# Altium PCB NE555-PWM.PCBDOC
Units mm, origin at the board's own origin, x right, y up, seen from the top; angles counter-clockwise.
Board outline 43.05 x 33.53 mm, 2 copper layers (Top Layer, Bottom Layer); 11 components, 11 nets, 36 pads, 0 vias.
Unrouted connection lines stored in the file: 10.
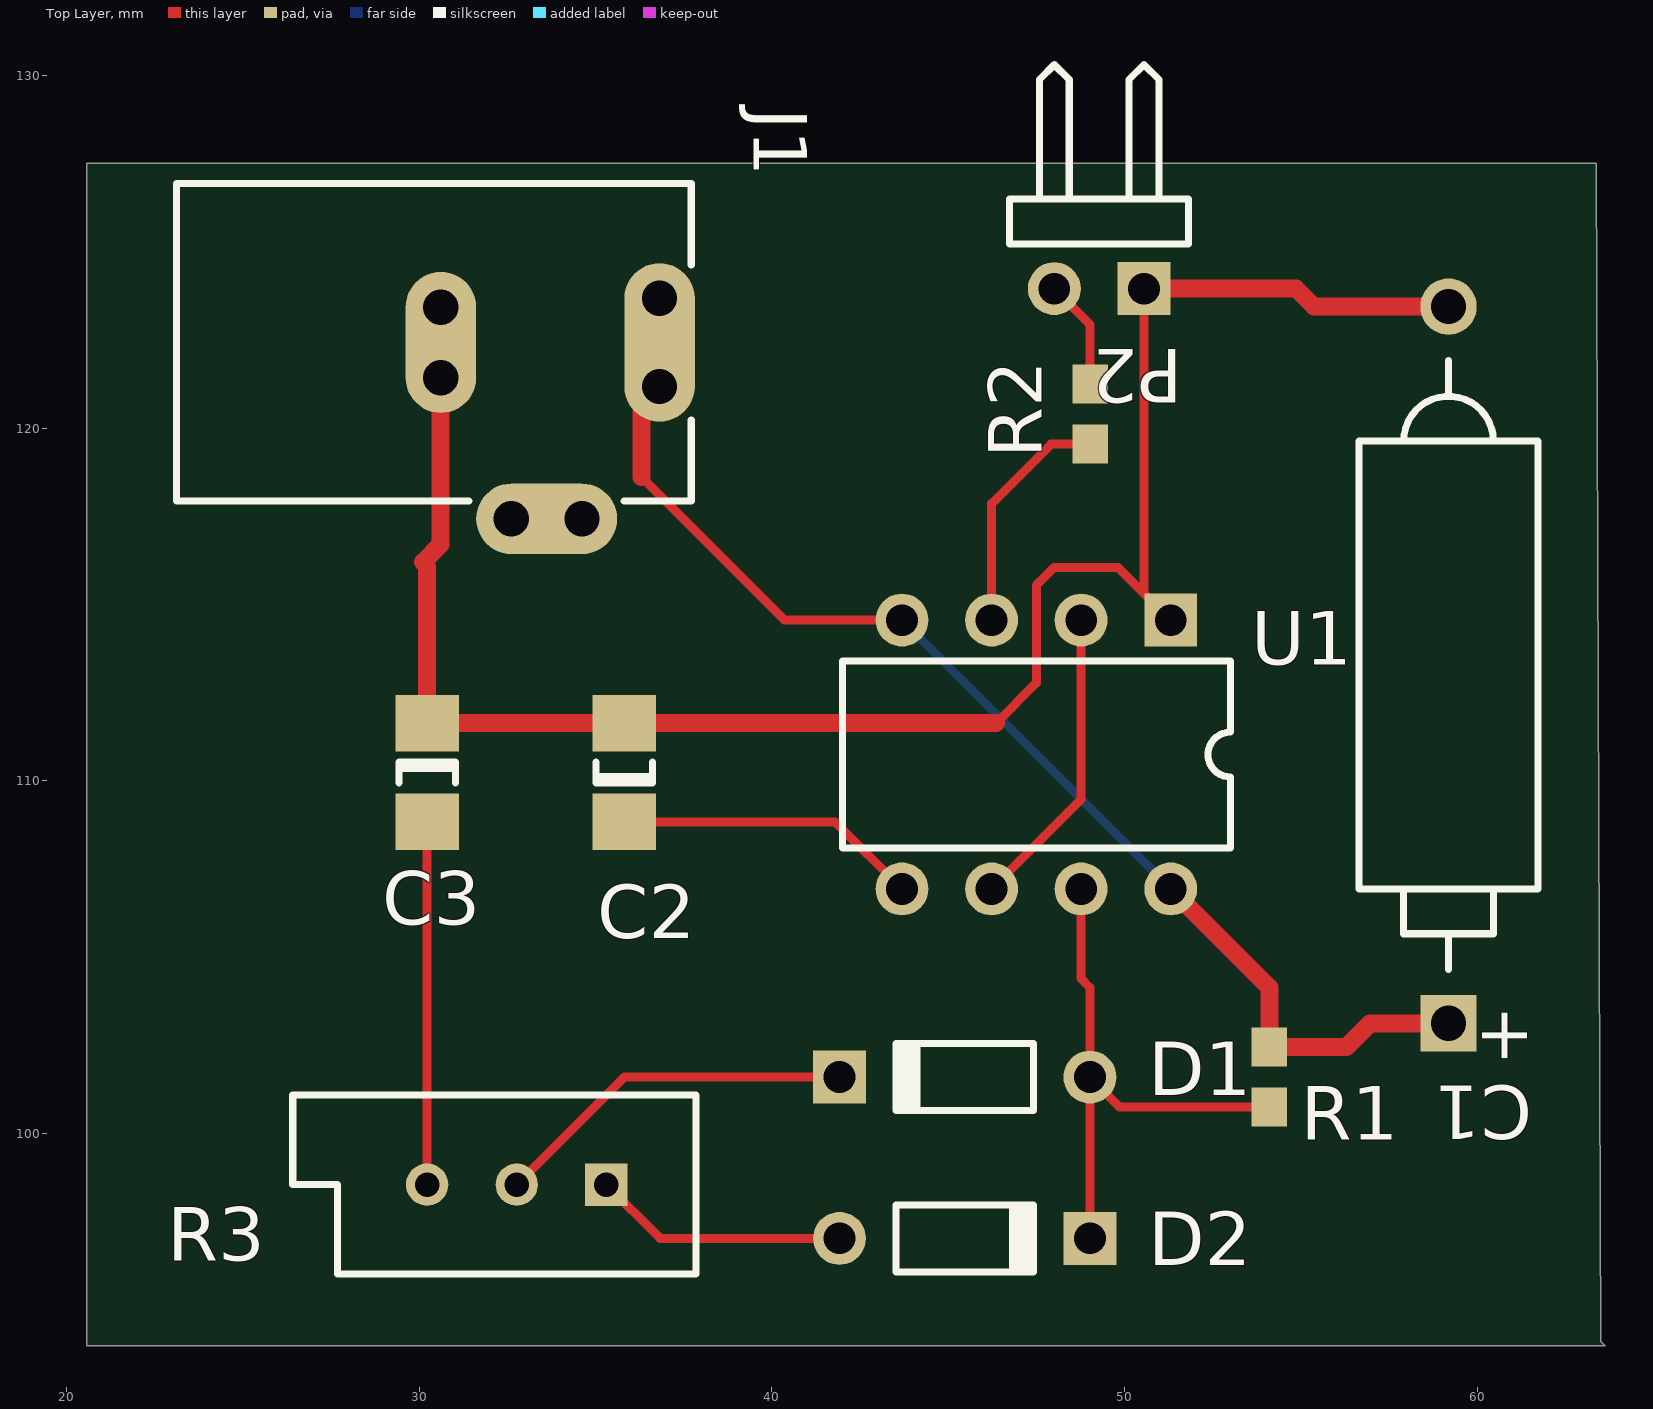
[diagram p0: Top Layer view]
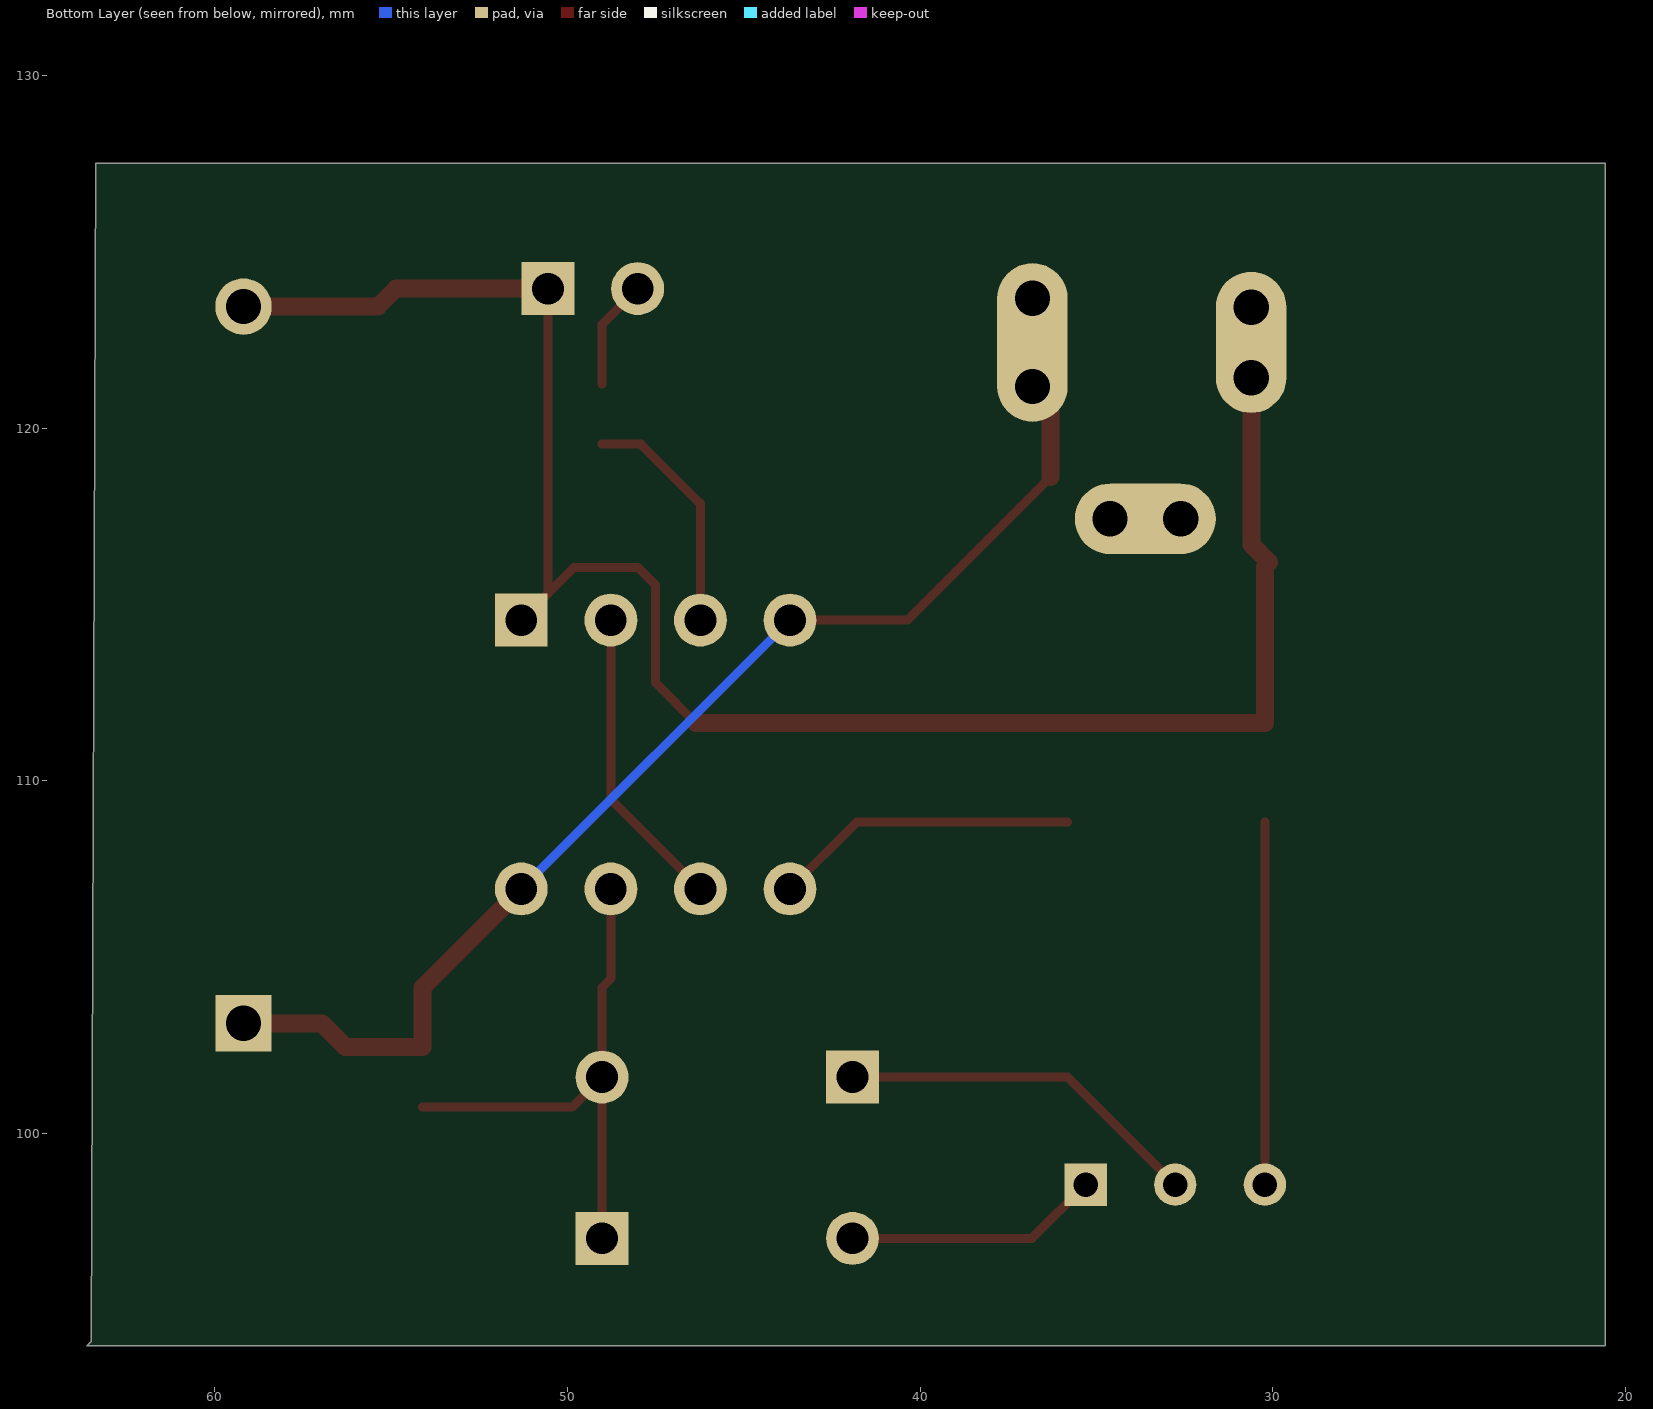
[diagram p1: Bottom Layer view, seen from below]

## Layer stack, top to bottom
Top Layer: signal copper 0.0356
Dielectric: dielectric 0.32, FR-4, Dk 4.8
Bottom Layer: signal copper 0.0356

## Board outline
63.373,127.508 20.574,127.508 20.574,93.98 63.627,93.98 63.5,94.107

## Design rules (kind name [scope] priority, off if disabled: settings)
Clearance [All] p1: gap=0.254
ComponentClearance [All] p1: gap=0.254 collisioncheckmode=3 verticalgap=0.254
PolygonConnect [All] p1: connectstyle=Relief reliefconductorwidth=0.254 reliefentries=4 polygonreliefangle="90 Angle"
RoutingVias [All] p1: holewidth=0.711 width=1.27 viastyle="Through Hole" minholewidth=0.711 minwidth=1.27 maxholewidth=0.711 maxwidth=1.27
SolderMaskExpansion [All] p1: expansion=0.102
TestPointUsage [All] p1: valid=0 allowmultiple=FALSE
Testpoint [All] p1: side=15 testpointundercomponent=TRUE minsize=1.016 maxsize=2.54 preferedsize=1.524 minholesize=0 maxholesize=1.016 preferedholesize=0.813 testpointgrid=0.025 style=1023 order=0-112345678
Width [All] p1: maxlimit=0.508 minlimit=0.254 preferedwidth=0.254 minimp=50.000000 maximp=50.000000 favimp=50.000000
17 further rules are at their usual default settings.

## Components (designator, comment, footprint, x,y, rotation, side; value= is the part's Value field where it differs from the comment)
C1 "470uF" CAPPA23.6-18.5x8.5 59.182,113.284 r270 top
C2 "0.01" CC1608-0603 35.814,110.236 r90 top
C3 "0.1" CC1608-0603 30.226,110.236 r270 top
D1 "Diode 1N4148" DIO7.1-3.9x1.9 45.466,101.6 r180 top
D2 "Diode 1N4148" DIO7.1-3.9x1.9 45.466,97.028 r0 top
J1 "PWR2.5" KLD-0202 23.114,122.428 r0 top
P2 "Header 2H" HDR1X2H 50.546,123.952 r180 top
R1 "1k" CR1608-0603 54.102,101.6 r90 top
R2 "1k" CR1608-0603 49.022,120.396 r90 top
R3 "50k" VR5 32.766,98.552 r180 top
U1 "NE555N" DIP8 47.498,110.744 r180 top

## Footprints (in the part's own frame and the unit in brackets; to place one, negate y for a bottom-side part, rotate by r counter-clockwise, add the part's x,y. Pads: shape width x height; smd on the part's side, far side on the other; paste and mask are expansions set on the pad)
CAPPA23.6-18.5x8.5 [mm] "Capacitor, Axial, Polarised; Body 18.5 x 8.5 mm (LxDia. max), Lead Dia. 0.8 mm (typ)"
CC1608-0603 [mm] "Chip Capacitor; Body 1.6 x 0.8 mm (LxW typ)"
CR1608-0603 [mm] "Chip Resistor; Body 1.6 x 0.8 mm (LxW typ)"
  rect 1.1x1 smd: 1(-0.85,0) 2(0.85,0)
DIO7.1-3.9x1.9 [mm] "Diode, Axial; Body 3.8 x 1.9 mm (LxDia. max), Lead Dia. 0.53 mm (max)"
  round 1.5 hole 0.9: 1(-3.55,0)
  rect 1.5x1.5 hole 0.9: 2(3.55,0)
  silkscreen extent -1.95,-0.95 2.05,0.95
DIP8 [mm] "DIP; 8 Leads; Row Spacing 7.62 mm; Pitch 2.54 mm"
  rect 1.5x1.5 hole 0.9: 1(-3.81,-3.81)
  round 1.5 hole 0.9: 2(-1.27,-3.81) 3(1.27,-3.81) 4(3.81,-3.81) 5(3.81,3.81) 6(1.27,3.81) 7(-1.27,3.81) 8(-3.81,3.81)
  silkscreen extent -5.5,-2.65 5.5,2.65
HDR1X2H [mm] "Connector; Header; 2 Position; Right Angle"
  rect 1.5x1.5 hole 0.9: 1(0,0)
  round 1.5 hole 0.9: 2(2.54,0)
  silkscreen extent -1.27,-6.35 3.81,-1.27
KLD-0202 [mm] "DC Power Jack, 2.5mm, KLD Series, PCB Mount"
  oval 2x4.5 all layers, no hole: 1(13.7,0)
  round 1.5 hole 1: 1A(13.7,-1.25) 1B(13.7,1.25) 2A(7.5,-1) 2B(7.5,1) 3A(9.5,-5) 3B(11.5,-5)
  oval 2x4 all layers, no hole: 2(7.5,0)
  oval 4x2 all layers, no hole: 3(10.5,-5)
  silkscreen extent 0,-4.5 14.6,4.5
VR5 [mm] "Potentiometer; 3 Leads"
  rect 1.2x1.2 hole 0.7: 1(-2.54,0)
  round 1.2 hole 0.7: 2(0,0) 3(2.54,0)
  silkscreen extent -5.08,-2.54 6.35,2.54

## Part data
C1: library part "Cap Pol2", "Polarized Capacitor (Axial)"
C2 C3: library part "Cap Semi", "Capacitor (Semiconductor SIM Model)"
D1 D2: "High Conductance Fast Diode"
J1: "Low Voltage Power Supply Connector"
P2: "Header, 2-Pin, Right Angle"
R1 R2: library part Res3, "Resistor"
R3: library part RPot, "Potentiometer"
U1: "General-Purpose Single Bipolar Timer"

## Free pads (board coordinates)
  rect 1.8x1.6 smd: 1(30.226,111.636) 1(35.814,108.836) 2(30.226,108.836) 2(35.814,111.636)
  rect 1.6x1.6 hole 1: 1(59.182,103.124)
  round 1.6 hole 1: 2(59.182,123.444)

## Nets (pads, with @x,y where several pads share a name; then routed paths per layer and width w, separated by ;. In a path a pad name is that pad's centre, name@x,y a point inside that pad or via, vN(x,y) a via of type N, cw(c..) or ccw(c..) an arc to the next point about the centre after c; other vN are vias at no path point)
+5: J1.1 J1.1A J1.1B pad.1@59.182,103.124 R1.2 U1.4 U1.8 | length 36.6
  Top Layer w0.254: 36.306,118.609 40.361,114.554 U1.4 ; J1.1A@36.306,120.67 36.306,121.178 36.306,122.428 J1.1B@36.306,123.17
  Top Layer w0.508: 36.306,118.609 J1.1A@36.306,120.67 ; U1.8 54.102,104.14 R1.2 56.286,102.45 56.96,103.124 pad.1@59.182,103.124
  Bottom Layer w0.254: J1.1A@36.306,120.67 36.306,121.178 J1.1@36.306,121.92 ; U1.4 U1.8
GND: J1.2 J1.2A J1.2B P2.1 pad.1@30.226,111.636 pad.2@35.814,111.636 pad.2@59.182,123.444 U1.1 | length 54.8
  Top Layer w0.254: 30.106,116.198 30.226,116.078 ; J1.2A@30.106,120.92 30.106,121.428 30.106,122.428 J1.2B@30.106,122.92 ; 30.607,116.699 30.607,116.84 ; 46.358,111.636 47.498,112.776 47.498,115.545 48.006,116.053 49.809,116.053 50.546,115.316 ; P2.1 50.546,115.316 ; U1.1 50.546,115.316
  Top Layer w0.5: 54.864,123.952 55.372,123.444
  Top Layer w0.508: 30.106,116.198 30.607,116.699 ; 30.226,116.078 30.226,111.636 35.814,111.636 46.358,111.636 ; 30.607,116.84 30.607,121.428 J1.2A@30.607,121.562 ; P2.1 54.864,123.952 ; 55.372,123.444 pad.2@59.182,123.444
NetC2_1: pad.1@35.814,108.836 U1.5 | length 8.7
  Top Layer w0.254: pad.1@35.814,108.836 41.786,108.836 U1.5
NetC3_2: pad.2@30.226,108.836 R3.3 | length 10.3
  Top Layer w0.254: R3.3 pad.2@30.226,108.836
NetD1_1: D1.1 D2.2 R1.1 U1.7 | length 15.4
  Top Layer w0.254: U1.7 48.768,104.388 49.016,104.14 D1.1 ; D2.2 D1.1 ; R1.1 49.866,100.75 D1.1
NetD1_2: D1.2 R3.2 | length 10.4
  Top Layer w0.254: R3.2 35.814,101.6 D1.2
NetD2_1: D2.1 R3.1 | length 7.2
  Top Layer w0.254: R3.1 36.83,97.028 D2.1
NetJ1_3: J1.3 J1.3A J1.3B | length 2
  Bottom Layer w0.254: J1.3A@32.106,116.92 32.614,116.92 33.614,116.92 J1.3B@34.106,116.92
NetP2_2: P2.2 R2.2 | length 3.1
  Top Layer w0.254: P2.2 49.022,122.936 R2.2
NetR2_1: R2.1 U1.3 | length 6.8
  Top Layer w0.254: U1.3 46.228,117.856 47.918,119.546 R2.1
NetU1_2: U1.2 U1.6 | length 8.7
  Top Layer w0.254: U1.6 48.768,109.474 U1.2

## Silkscreen, mask and mechanical layers (free items; w line width, h text height)
Top Overlay:
  lines w0.2: 29.426,109.936 29.426,110.536 31.026,110.536 31.026,109.936 ; 29.426,110.346 31.026,110.346 ; 35.014,110.126 36.614,110.126 ; 35.014,110.536 35.014,109.936 36.614,109.936 36.614,110.536 ; 57.912,106.934 57.912,105.664 60.452,105.664 60.452,106.934 ; 57.912,119.634 cw(c59.182,119.634) 60.452,119.634 ; 59.182,104.648 59.182,105.664 ; 59.182,120.904 59.182,121.92 ; 56.642,106.934 61.722,106.934 61.722,119.634 56.642,119.634 56.642,106.934
  text "+" at 60.132,103.632 h1.5 r270

## Text inside footprints (layer, text, board x,y; h text height)
J1: Mechanical 1 "Alert PCB fab to slot details" at 23.4,128.494 h0.3; Mechanical 1 "Assign keep-out area to slot" at 23.4,128.994 h0.3; Mechanical 1 "Mech 1 - Slot cut-out" at 23.4,127.994 h0.3; Mechanical 1 "Mech 2 - Clearance, move to internal plane if present" at 23.4,127.494 h0.3